# EAGLE board LaserTest (EAGLE 6.6.0)
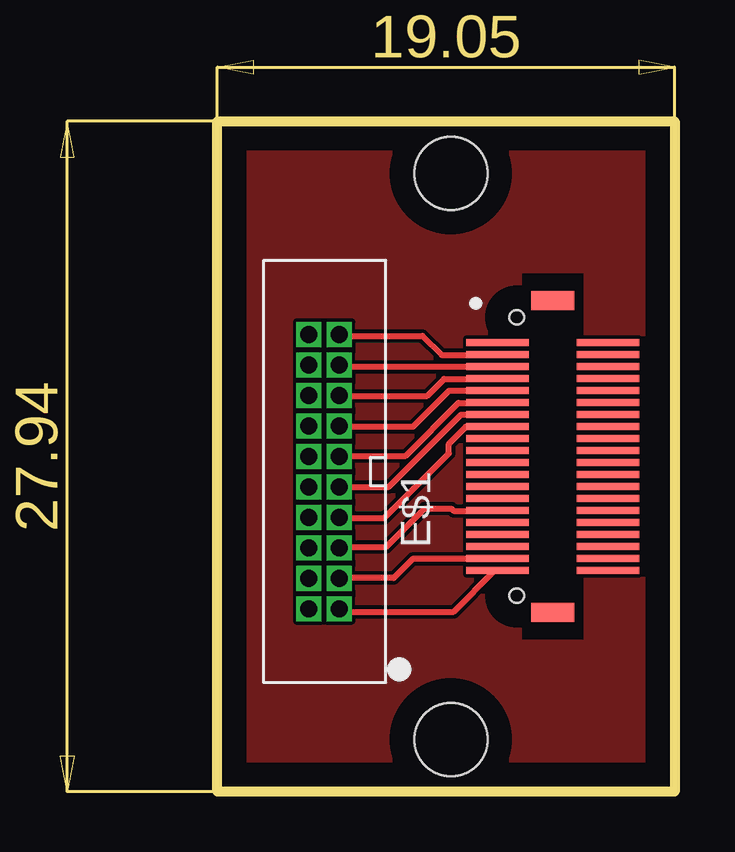
[diagram p0: board, top side]
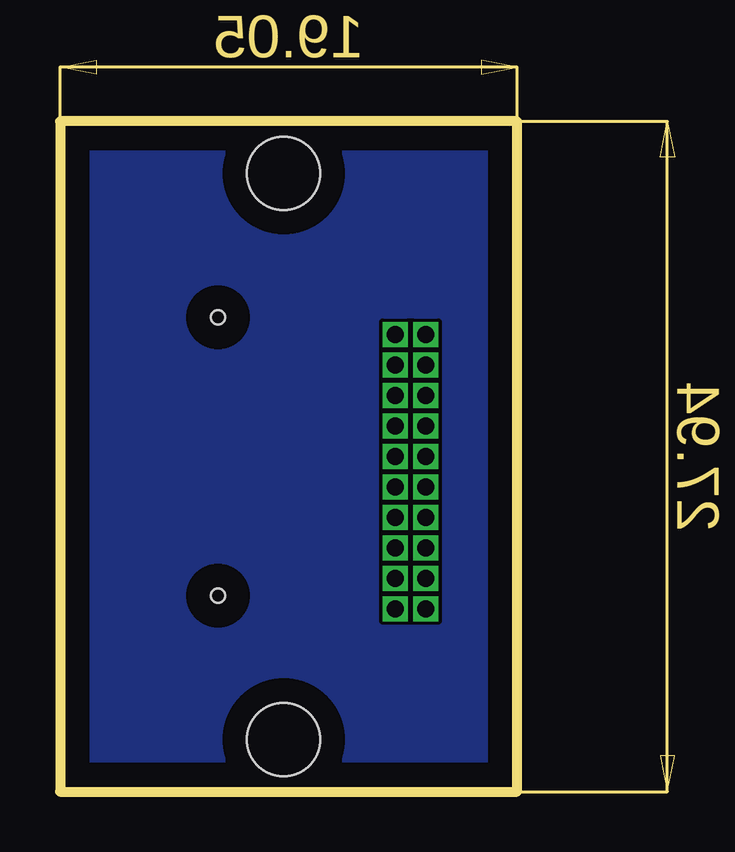
[diagram p1: board, bottom side, seen from below]

Size 19.05 x 27.94 mm. Coordinates in mm from the lower left corner, seen from the top.
Outline: 0,27.94 19.05,27.94 19.05,0 0,0 0,27.94
Copper layers (1*16): Top 0.035mm / dielectric 1.5mm / Bottom 0.035mm
Design rules "default *": minimum track width 10mil, minimum drill 24mil, track to track 0.15mm, track to pad 0.15mm, pad to pad 0.15mm, via to via 0.15mm, smd to smd 0.15mm, copper to edge 40mil, drill to drill 8mil, minimum pad ring 1mil, minimum via ring 1mil, stop-mask expansion 4mil, vias tented up to drill 0mil, thermal gap 10mil

## Footprints (pad centres in the part's own frame; a part is rotated, then mirrored left to right if it is on the bottom)
2X10JTAG = drill 0.7 pad 1 square: P$1 -6.35,-1.27; P$2 -6.35,0; P$3 -5.08,-1.27; P$4 -5.08,0; P$5 -3.81,-1.27; P$6 -3.81,0; P$7 -2.54,-1.27; P$8 -2.54,0; P$9 -1.27,-1.27; P$10 -1.27,0; P$11 0,-1.27; P$12 0,0; P$13 1.27,-1.27; P$14 1.27,0; P$15 2.54,-1.27; P$16 2.54,0; P$17 3.81,-1.27; P$18 3.81,0; P$19 5.08,-1.27; P$20 5.08,0
DF12_M = smd 0.3 x 2.6: P$1 4.75,2.3; P$2 4.75,-2.3; P$3 4.25,2.3; P$4 4.25,-2.3; P$5 3.75,2.3; P$6 3.75,-2.3; P$7 3.25,2.3; P$8 3.25,-2.3; P$9 2.75,2.3; P$10 2.75,-2.3; P$11 2.25,2.3; P$12 2.25,-2.3; P$13 1.75,2.3; P$14 1.75,-2.3; P$15 1.25,2.3; P$16 1.25,-2.3; P$17 0.75,2.3; P$18 0.75,-2.3; P$19 0.25,2.3; P$20 0.25,-2.3; P$21 -0.25,2.3; P$22 -0.25,-2.3; P$23 -0.75,2.3; P$24 -0.75,-2.3; P$25 -1.25,2.3; P$26 -1.25,-2.3; P$27 -1.75,2.3; P$28 -1.75,-2.3; P$29 -2.25,2.3; P$30 -2.25,-2.3; P$31 -2.75,2.3; P$32 -2.75,-2.3; P$33 -3.25,2.3; P$34 -3.25,-2.3; P$35 -3.75,2.3; P$36 -3.75,-2.3; P$37 -4.25,2.3; P$38 -4.25,-2.3; P$39 -4.75,2.3; P$40 -4.75,-2.3 | smd 0.8 x 1.8: P$41 -6.5,0; P$42 6.5,0 | hole 0.6: -5.8,1.5; 5.8,1.5 | hole 3.048: 11.8,4.24; -11.8,4.24

## Placement (x,y rotation side)
E$1  [2X10JTAG]  3.81,13.97 90 top
E$2  [DF12_M]  13.97,13.97 90 top

## Library data of the parts
E$1 E$2 = KW2

## Tracks (layer width: path | path; a pad name or v marks a point on that pad's centre or on a via)
S$1
  Top 0.254: 5.04,19 8.54,19 9.34,18.2 11.74,18.2
S$2
  Top 0.254: 11.84,17.7 5.14,17.7 5.04,17.8
S$3
  Top 0.254: 5.04,16.5 8.74,16.5 9.44,17.2 11.84,17.2
S$4
  Top 0.254: 11.74,16.7 9.64,16.7 8.34,15.4 8.14,15.2 5.04,15.2
S$5
  Top 0.254: 5.14,14 7.84,14 10.04,16.2 11.74,16.2
S$6
  Top 0.254: 11.74,15.7 10.14,15.7 7.64,13.2 7.14,12.7 5.04,12.7
S$7
  Top 0.254: 5.04,11.4 6.94,11.4 9.64,14.1 9.64,14.5 10.34,15.2 11.44,15.2
S$8
  Top 0.254: 5.14,7.5 9.84,7.5 11.54,9.2
S$9
  Top 0.254: 11.64,9.7 8.14,9.7 7.34,8.9 5.14,8.9
S$10
  Top 0.254: 5.04,10.2 7.04,10.2 8.64,11.8 9.74,11.8 9.84,11.7 11.44,11.7
S$11
  pour Top: 19.64,28.4 19.84,-0.6 -0.56,-0.6 -0.66,28.6
S$12
  pour Bottom: -0.56,28.3 19.54,28.3 19.54,-0.5 -0.56,-0.5